# EAGLE board timelapse  (EAGLE 7.2.0)
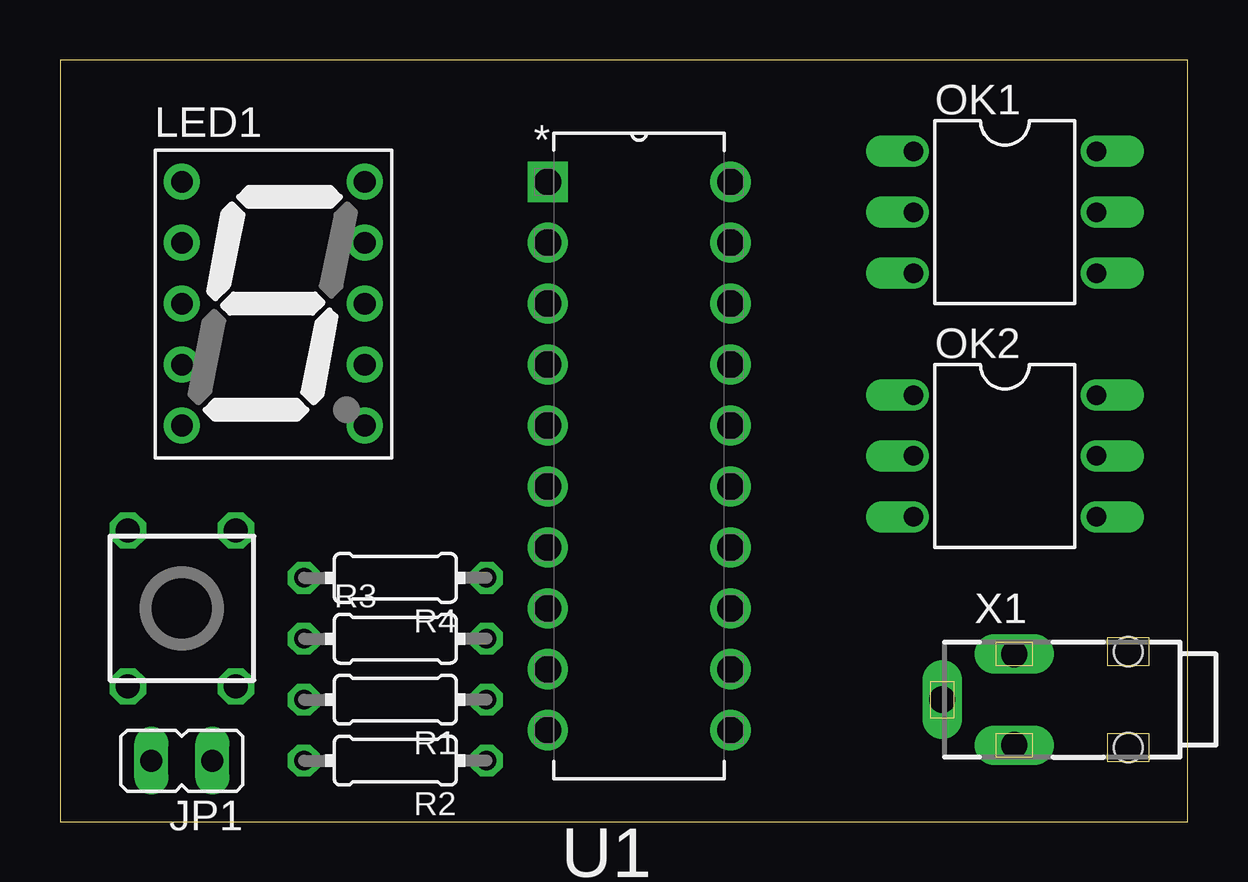
[diagram p0: board, top side]
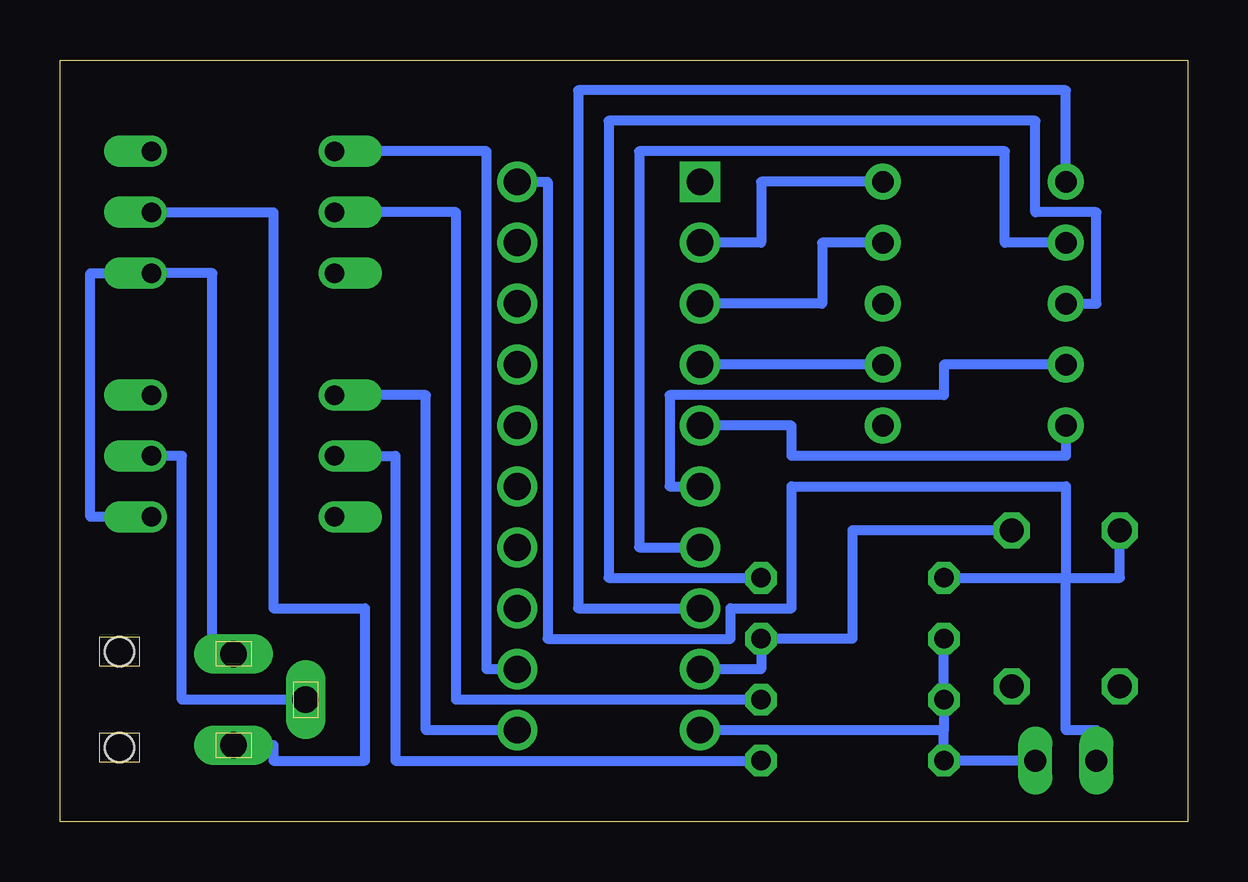
[diagram p1: board, bottom side, seen from below]

Size 46.99 x 31.75 mm. Coordinates in mm from the lower left corner, seen from the top.
Outline: 0,0 46.99,0 46.99,31.75 46.66,31.74 0,31.74 0,0
Copper layers (1*16): Top 0.035mm / dielectric 1.5mm / Bottom 0.035mm
Design rules "default": minimum track width 10mil, minimum drill 24mil, track to track 8mil, track to pad 8mil, pad to pad 8mil, via to via 8mil, smd to smd 8mil, copper to edge 40mil, drill to drill 8mil, minimum pad ring 10mil, minimum via ring 8mil, stop-mask expansion 4mil, vias tented up to drill 0mil, thermal gap 10mil

## Footprints (pad centres in the part's own frame; a part is rotated, then mirrored left to right if it is on the bottom)
JP1 = drill 0.914 long: 1 0,-1.27; 2 0,1.27
SA39-11SRWA = drill 0.9 pad 1.5: 1 -3.81,5.08; 2 -3.81,2.54; 3 -3.81,0; 4 -3.81,-2.54; 5 -3.81,-5.08; 6 3.81,-5.08; 7 3.81,-2.54; 8 3.81,0; 9 3.81,2.54; 10 3.81,5.08
DIL06 = drill 0.813 offset: 1 -2.54,-3.81; 2 0,-3.81; 3 2.54,-3.81; 4 2.54,3.81; 5 0,3.81; 6 -2.54,3.81
0204/7 = drill 0.813 octagon: 1 -3.81,0; 2 3.81,0
DIP254P762X533-20 = drill 1.118 square: 1 -7.62,22.86 | drill 1.118: 2 -7.62,20.32; 3 -7.62,17.78; 4 -7.62,15.24; 5 -7.62,12.7; 6 -7.62,10.16; 7 -7.62,7.62; 8 -7.62,5.08; 9 -7.62,2.54; 10 -7.62,0; 11 0,0; 12 0,2.54; 13 0,5.08; 14 0,7.62; 15 0,10.16; 16 0,12.7; 17 0,15.24; 18 0,17.78; 19 0,20.32; 20 0,22.86
JTP-1130 = drill 1 octagon: 1 3.25,-2.25; 2 -3.25,-2.25; 3 3.25,2.25; 4 -3.25,2.25
1501_05 = drill 1.1 pad 1.4 long: 1 -1.9,-8.5; 2 0,-11.5; 3 1.9,-8.5 | hole 1.2: -2,-3.75; 2,-3.75

## Placement (x,y rotation side)
JP1  Battery  [JP1]  5.08,2.54 90 top
LED1  7-SEG_SA39-11SRWA  [SA39-11SRWA]  8.89,21.59 0 top
OK1  4N35  [DIL06]  39.37,25.4 270 top
OK2  4N35  [DIL06]  39.37,15.24 270 top
R1  330  [0204/7]  13.97,5.08 180 top
R2  330  [0204/7]  13.97,2.54 180 top
R3  10K  [0204/7]  13.97,7.62 0 top
R4  330  [0204/7]  13.97,10.16 180 top
U1  ATTINY2313V-10PU  [DIP254P762X533-20]  27.94,3.81 0 top
U$1  JTP-1130C  [JTP-1130]  5.08,8.89 270 top
X1  1501_04  [1501_05]  48.26,5.08 270 top

## Library data of the parts
JP1 = jumper
LED1 = display-kingbright; OC_FARNELL: unknown; OC_NEWARK: unknown
OK1 OK2 = optocoupler; MF: FAIRCHILD SEMICONDUCTOR; MPN: 4N35; OC_FARNELL: 1328375; OC_NEWARK: 72K9946
R1-R4 = eagle-ltspice; SPICEMODEL: NONE; SPICEPREFIX: R
U1 = Atmel_By_element14_Batch_1-00; MPN: ATTINY2313V-10PU; OC_FARNELL: 9171614; OC_NEWARK: 01M6916; PACKAGE: DIP-20; SUPPLIER: ATMEL
U$1 = n39; REICHELT: TASTER 9305
X1 = con-lumberg; OC_FARNELL: 1216977; OC_NEWARK: unknown

## Nets
N$1: LED1.10 U1.2
N$2: LED1.9 U1.3
N$3: LED1.4 U1.6
N$4: LED1.2 U1.7
N$5: LED1.1 U1.8
N$6: LED1.7 U1.4
N$7: LED1.5 U1.5
N$8: LED1.3 R4.1
N$9: JP1.2 R4.2 U1.20 U$1.2
N$10: R3.2 U1.9 U$1.4
N$11: JP1.1 R1.2 R2.2 R3.1 U1.10
N$12: OK2.1 U1.11
N$13: OK2.2 R2.1
N$14: OK1.2 R1.1
N$15: OK1.1 U1.12
N$16: OK1.4 OK2.4 X1.1
N$18: OK1.5 X1.3
N$19: OK2.5 X1.2

## Tracks (layer width: path | path; a pad name or v marks a point on that pad's centre or on a via)
N$1
  Bottom 0.406: LED1.10 17.78,26.67 17.78,24.13 U1.2
N$2
  Bottom 0.406: LED1.9 15.24,24.13 15.24,21.59 U1.3
N$3
  Bottom 0.406: LED1.4 10.16,19.05 10.16,17.78 21.59,17.78 21.59,13.97 U1.6
N$4
  Bottom 0.406: LED1.2 7.62,24.13 7.62,27.94 22.86,27.94 22.86,11.43 U1.7
N$5
  Bottom 0.406: LED1.1 5.08,30.48 25.4,30.48 25.4,8.89 U1.8
N$6
  Bottom 0.406: LED1.7 U1.4
N$7
  Bottom 0.406: LED1.5 5.08,15.24 16.51,15.24 16.51,16.51 U1.5
N$8
  Bottom 0.406: LED1.3 3.81,21.59 3.81,25.4 6.35,25.4 6.35,29.21 24.13,29.21 24.13,10.16 R4.1
N$9
  Bottom 0.406: R4.2 5.08,10.16 | 5.08,10.16 2.83,10.16 U$1.2 | U1.20 26.67,26.67 26.67,7.62 19.05,7.62 19.05,8.89 16.51,8.89 16.51,13.97 5.08,13.97 5.08,11.43 5.08,10.16 | JP1.2 3.81,3.81 5.08,3.81 5.08,10.16
N$10
  Bottom 0.406: U1.9 17.78,6.35 R3.2 13.97,7.62 13.97,12.14 U$1.4
N$11
  Bottom 0.406: JP1.1 R2.2 10.16,3.81 | R3.1 R1.2 10.16,3.81 | 10.16,3.81 U1.10
N$12
  Bottom 0.406: U1.11 31.75,3.81 31.75,17.78 OK2.1
N$13
  Bottom 0.406: OK2.2 33.02,15.24 33.02,2.54 R2.1
N$14
  Bottom 0.406: R1.1 30.48,5.08 30.48,25.4 OK1.2
N$15
  Bottom 0.406: U1.12 29.21,6.35 29.21,27.94 OK1.1
N$16
  Bottom 0.406: X1.1 40.64,6.98 40.64,22.86 OK1.4 45.72,22.86 45.72,12.7 OK2.4
N$18
  Bottom 0.406: OK1.5 38.1,25.4 38.1,8.89 34.29,8.89 34.29,2.54 38.1,2.54 38.1,3.18 X1.3
N$19
  Bottom 0.406: X1.2 41.91,5.08 41.91,15.24 OK2.5